# Altium PCB RatumnScanner_PcbDoc@20260328.pcbdoc (part 1 of 2)
Units mil, origin at the board's own origin, x right, y up, seen from the top; angles counter-clockwise.
Board outline 3937.01 x 983.86 mil, 6 copper layers (Top Layer, 内层1, 内层2, CONNECTION, IO_PINS, Bottom Layer), stack 62.125 mil thick; 143 components, 128 nets, 581 pads, 302 vias.
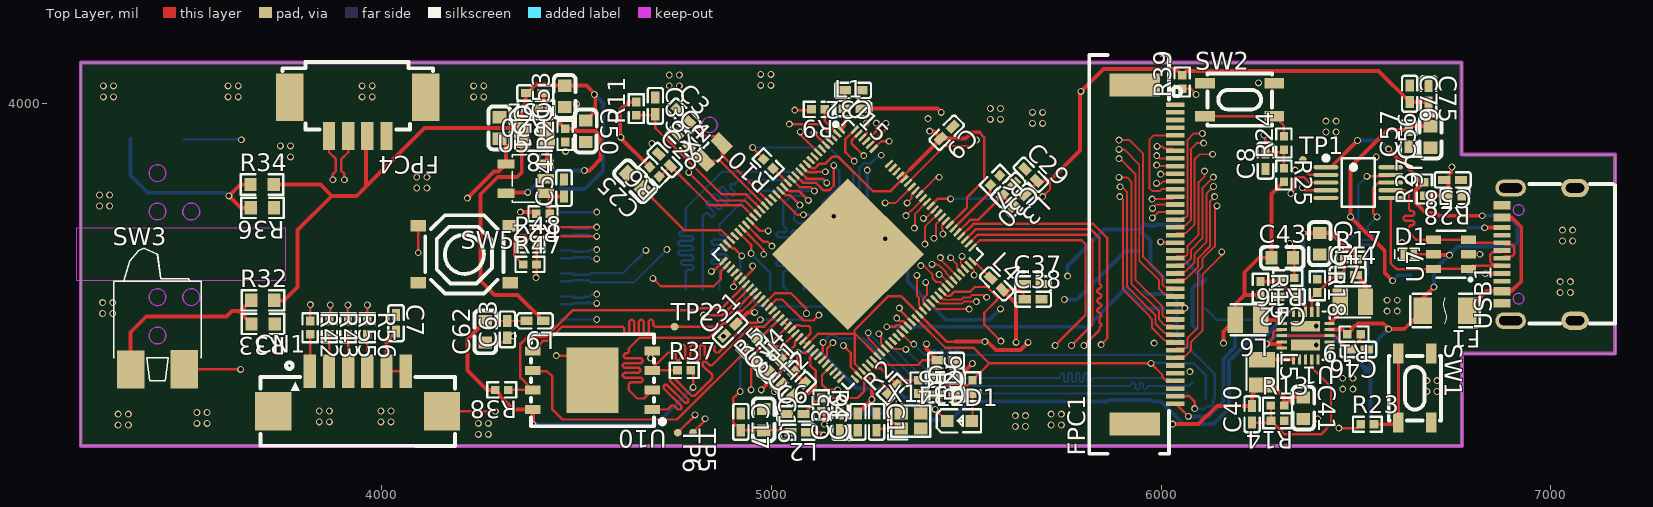
[diagram p0: Top Layer view]
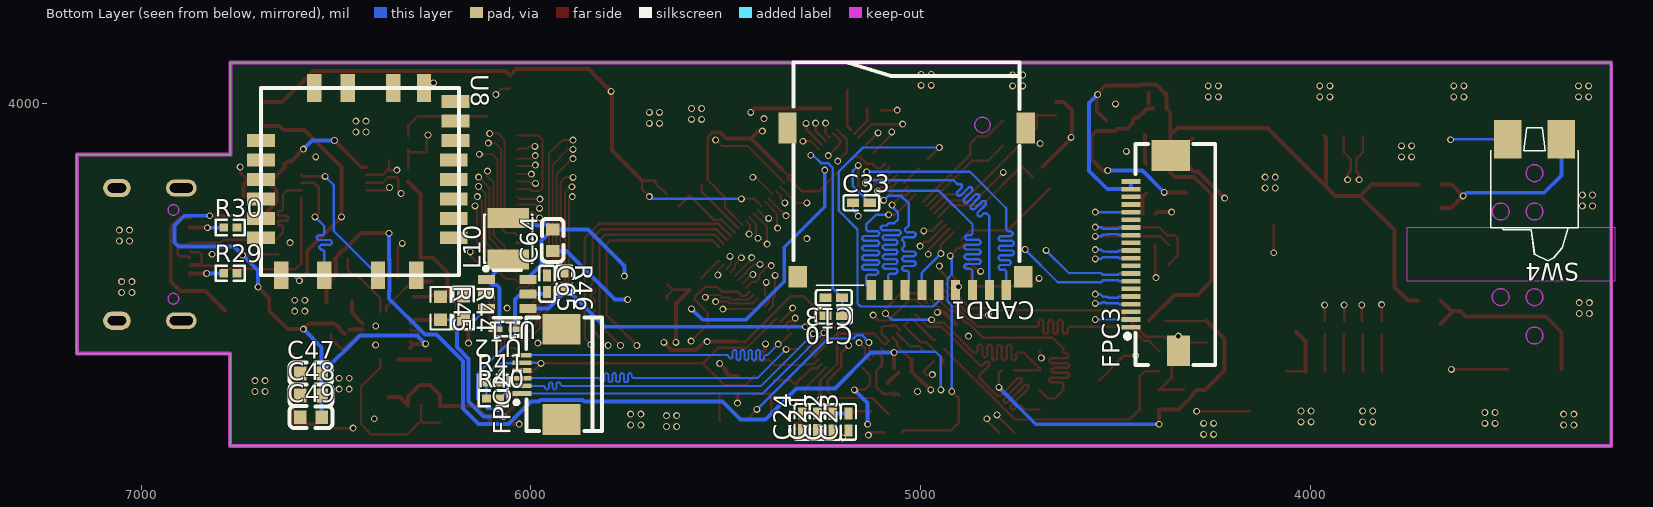
[diagram p1: Bottom Layer view, seen from below]
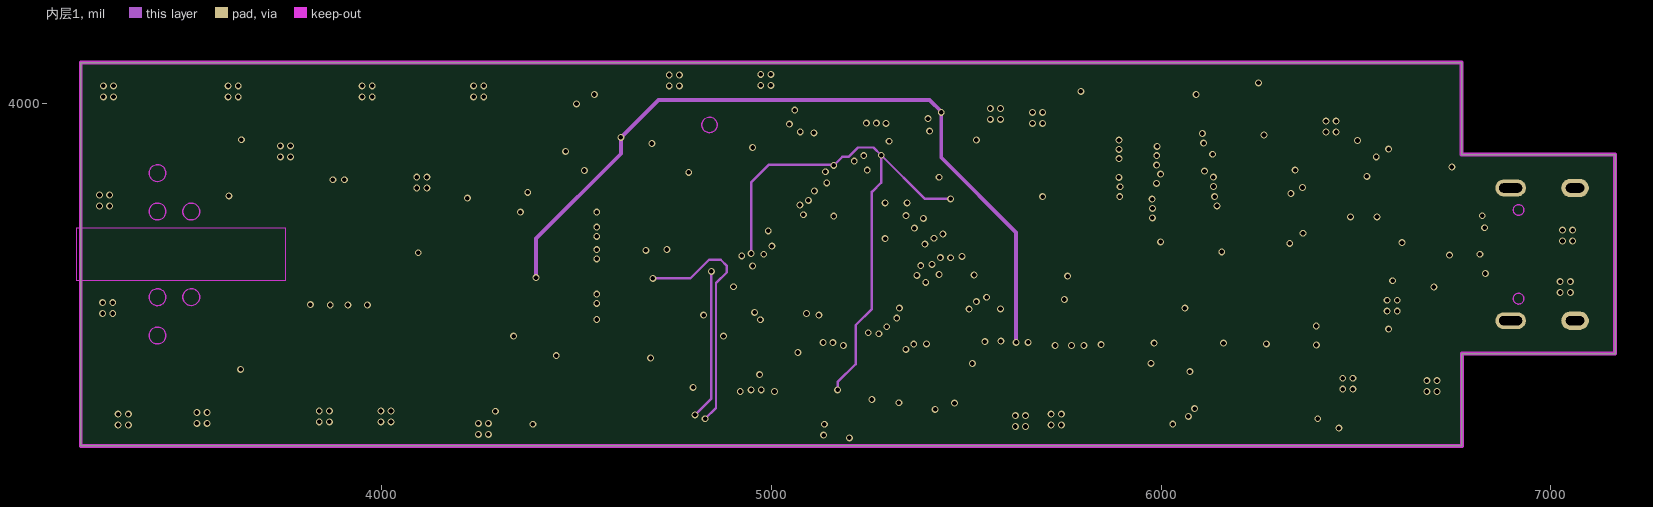
[diagram p2: 内层1]
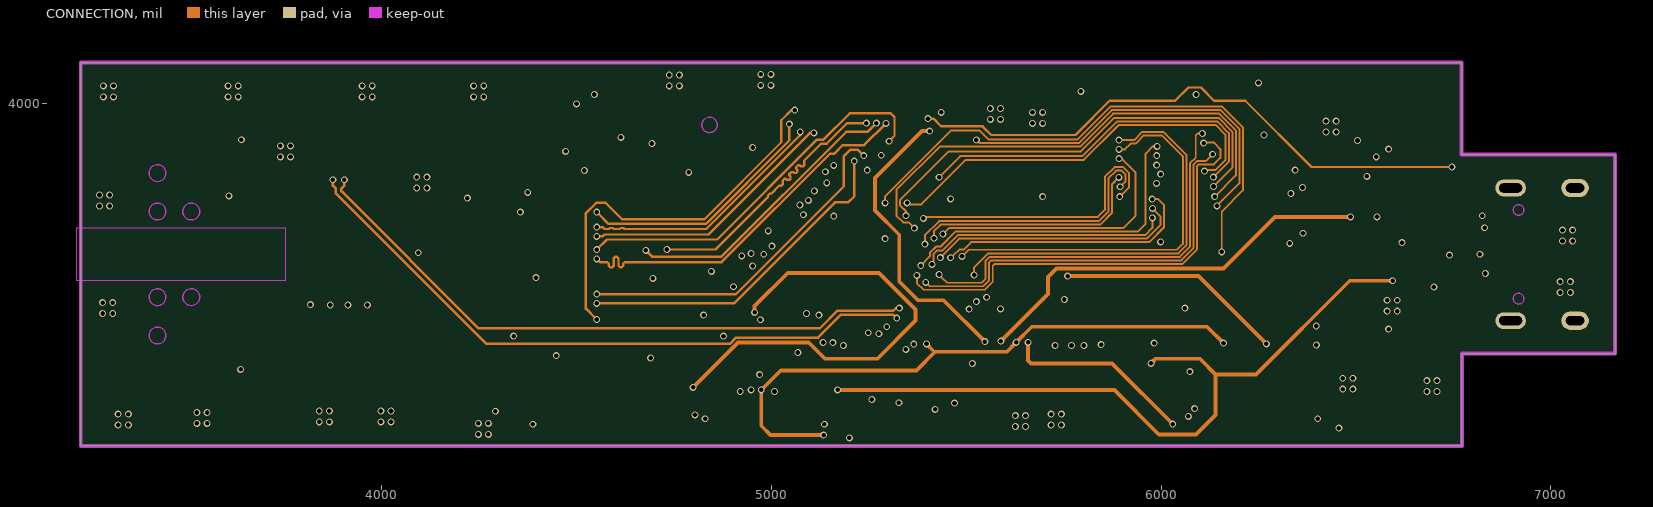
[diagram p3: CONNECTION]
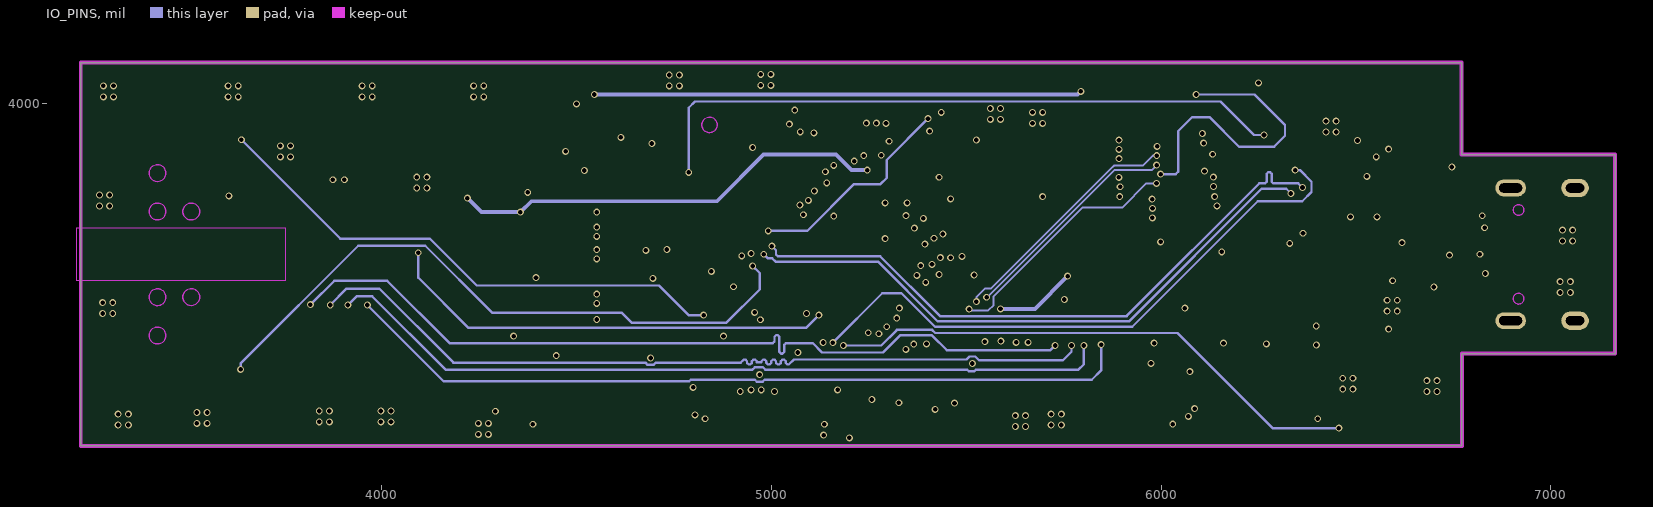
[diagram p4: IO_PINS]

## Layer stack, top to bottom
Top Layer: signal copper 1.378
Dielectric1: surface 3.913, 3313 RC57% 4.2mil, Dk 0
内层1: signal copper 1.378
Dielectric2: surface 21.654, 0.55mm H/H No copper, Dk 0
内层2: signal copper 1.378
Dielectric3: surface 4.283, 2116 RC54% 4.9mil, Dk 0
CONNECTION: signal copper 0.598
Dielectric4: surface 21.654, 0.55mm H/H No copper, Dk 0
IO_PINS: signal copper 0.598
Dielectric5: surface 3.913, 3313 RC57% 4.2mil, Dk 0
Bottom Layer: signal copper 1.378

## Board outline
7165.01,3869.86 7165.01,3359.23 6771.9,3359.23 6771.9,3122.14 3228,3122.14 3228,4106 6771.31,4106 6771.31,3869.86

## Design rules (kind name [scope] priority, off if disabled: settings)
BoardOutlineClearance copperThickness1oz [All] p0: genericclearance=10 ignorepadtopadclearanceinfootprint=FALSE except(0: Arc-SplitContinuation Track-SplitContinuation SMDPad-SplitContinuation THPad-SplitContinuation Via-SplitContinuation Fill-SplitContinuation Poly-SplitContinuation Region-SplitContinuation Text-SplitContinuation)
BoardOutlineClearance copperThickness2oz [All] p0: genericclearance=10 ignorepadtopadclearanceinfootprint=FALSE except(0: Arc-SplitContinuation Track-SplitContinuation SMDPad-SplitContinuation THPad-SplitContinuation Via-SplitContinuation Fill-SplitContinuation Poly-SplitContinuation Region-SplitContinuation Text-SplitContinuation)
BoardOutlineClearance 50R_安全间距 [All] p0: genericclearance=10 ignorepadtopadclearanceinfootprint=FALSE except(0: Arc-SplitContinuation Track-SplitContinuation SMDPad-SplitContinuation THPad-SplitContinuation Via-SplitContinuation Fill-SplitContinuation Poly-SplitContinuation Region-SplitContinuation Text-SplitContinuation)
BoardOutlineClearance Plane_innerPlane [All] p0: genericclearance=10 ignorepadtopadclearanceinfootprint=FALSE except(0: Arc-SplitContinuation Track-SplitContinuation SMDPad-SplitContinuation THPad-SplitContinuation Via-SplitContinuation Fill-SplitContinuation Poly-SplitContinuation Region-SplitContinuation Text-SplitContinuation)
BoardOutlineClearance Copper_copperRegion [All] p0: genericclearance=10 ignorepadtopadclearanceinfootprint=FALSE except(0: Arc-SplitContinuation Track-SplitContinuation SMDPad-SplitContinuation THPad-SplitContinuation Via-SplitContinuation Fill-SplitContinuation Poly-SplitContinuation Region-SplitContinuation Text-SplitContinuation)
BoardOutlineClearance otherClearance [All] p0: genericclearance=10 ignorepadtopadclearanceinfootprint=FALSE except(0: Arc-SplitContinuation Track-SplitContinuation SMDPad-SplitContinuation THPad-SplitContinuation Via-SplitContinuation Fill-SplitContinuation Poly-SplitContinuation Region-SplitContinuation Text-SplitContinuation)
Clearance copperThickness1oz [All] p1: gap=7 ignorepadtopadclearanceinfootprint=FALSE
Clearance copperThickness2oz [All] p1: gap=7 ignorepadtopadclearanceinfootprint=FALSE
Clearance 50R_安全间距 [All] p1: gap=7 ignorepadtopadclearanceinfootprint=FALSE
Clearance Plane_innerPlane [All] p1: gap=7 ignorepadtopadclearanceinfootprint=FALSE
Clearance Copper_copperRegion [All] p1: gap=7 ignorepadtopadclearanceinfootprint=FALSE
Clearance otherClearance [All] p1: gap=7 ignorepadtopadclearanceinfootprint=FALSE
DiffPairsRouting USB [All] p1: maxuncoupledlength=30 minlimit=7.4803 maxlimit=Infinity mostfreqgap=7.7953 toplayer_minwidth=6.1811 toplayer_prefwidth=6.1811 toplayer_maxwidth=6.1811 bottomlayer_minwidth=6.1811 bottomlayer_prefwidth=6.1811 bottomlayer_maxwidth=6.1811 midlayer1_minwidth=6.1811 midlayer1_prefwidth=6.1811 midlayer1_maxwidth=6.1811 midlayer2_minwidth=6.1811 midlayer2_prefwidth=6.1811 midlayer2_maxwidth=6.1811 midlayer3_minwidth=6.1811 midlayer3_prefwidth=6.1811 midlayer3_maxwidth=6.1811 midlayer4_minwidth=6.1811 midlayer4_prefwidth=6.1811 midlayer4_maxwidth=6.1811
DiffPairsRouting GMII/MIPI [All] p1: maxuncoupledlength=10 minlimit=7.9921 maxlimit=Infinity mostfreqgap=7.9921 toplayer_minwidth=4.8819 toplayer_prefwidth=4.8819 toplayer_maxwidth=4.8819 bottomlayer_minwidth=4.8819 bottomlayer_prefwidth=4.8819 bottomlayer_maxwidth=4.8819 midlayer1_minwidth=4.8819 midlayer1_prefwidth=4.8819 midlayer1_maxwidth=4.8819 midlayer2_minwidth=4.8819 midlayer2_prefwidth=4.8819 midlayer2_maxwidth=4.8819 midlayer3_minwidth=4.8819 midlayer3_prefwidth=4.8819 midlayer3_maxwidth=4.8819 midlayer4_minwidth=4.8819 midlayer4_prefwidth=4.8819 midlayer4_maxwidth=4.8819
DiffPairsRouting MIC [All] p1: maxuncoupledlength=27.5984 minlimit=7.9921 maxlimit=Infinity mostfreqgap=7.9921 toplayer_minwidth=4.0157 toplayer_prefwidth=4.0157 toplayer_maxwidth=4.0157 bottomlayer_minwidth=4.0157 bottomlayer_prefwidth=4.0157 bottomlayer_maxwidth=4.0157 midlayer1_minwidth=4.0157 midlayer1_prefwidth=4.0157 midlayer1_maxwidth=4.0157 midlayer2_minwidth=4.0157 midlayer2_prefwidth=4.0157 midlayer2_maxwidth=4.0157 midlayer3_minwidth=4.0157 midlayer3_prefwidth=4.0157 midlayer3_maxwidth=4.0157 midlayer4_minwidth=4.0157 midlayer4_prefwidth=4.0157 midlayer4_maxwidth=4.0157
PasteMaskExpansion pasteMaskExpansion [All] p1: expansion=0
PlaneConnect innerPlane [All] p1: planeconnectstyle=Relief reliefexpansion=20 reliefentries=4 reliefconductorwidth=10 reliefairgap=10
PolygonConnect copperRegion [All] p1: connectstyle=Direct reliefentries=4 reliefconductorwidth=10 polygonreliefangle="90 Angle" airgapwidth=10
RoutingVias viaSize [All] p1: viastyle="Through Hole" holewidth=11.811 minholewidth=11.811 maxholewidth=247.9922 width=11.811 minwidth=11.811 maxwidth=247.9922
SolderMaskExpansion solderMaskExpansion [All] p1: useseparateexpansions=TRUE expansion=2.0079 expansionbottom=2.0079
Width copperThickness1oz [All] p1: maxlimit=100 minlimit=5 preferedwidth=8
Width Sign50R [All] p1: maxlimit=6 minlimit=6 preferedwidth=6

## Components (designator, comment, footprint, x,y, rotation, side; value= is the part's Value field where it differs from the comment)
C1 "" C0402 5270,3184 r270 top
C2 "" C0402 5448,3254 r0 top
C3 "" C0402 4774,3970 r315 top
C4 "" C0402 4774,3906 r315 top
C6 "" C0402 5060.95,3204.4 r0 top
C7 "" C0402 4036.97,3437.18 r270 top
C8 "" C0402 6267.74,3854.2 r90 top
C9 "" C0402 5450,3926 r225 top
C10 "" C0402 5222.81,3456.06 r0 bottom
C11 "" C0402 5041.74,3295.75 r45 top
C12 "" C0402 5069.75,3268.26 r45 top
C13 "" C0402 5222.81,3502.71 r0 bottom
C14 "" C0402 5008,3328 r45 top
C15 "" C0402 5448.21,3342.01 r180 top
C16 "" C0603 4980.26,3189.39 r270 top
C17 "" C0402 4921.62,3183.92 r270 top
C21 "" C0402 5265.25,3184.02 r90 bottom
C22 "" C0402 5225.25,3183.43 r90 bottom
C23 "" C0402 5185.25,3183.73 r90 bottom
C24 "" C0402 5304,3184 r90 bottom
C25 "" C0603 4650,3802 r135 top
C28 "" C0402 4726,3856 r315 top
C29 "" C0402 5666,3818 r315 top
C30 "" C0402 5608,3780 r225 top
C31 "" C0402 4894,3420 r45 top
C32 "" C0402 5209.82,4034.76 r180 top
C33 "" C0402 5152,3746 r180 bottom
C34 "" C0402 5448,3302 r180 top
C35 "" C0402 5176,3184 r90 top
C36 "" C0402 5222,3184 r90 top
C37 "" C0402 5671.5,3537.77 r0 top
C38 "" C0402 5671.5,3498.82 r0 top
C39 "" C0402 4702.21,3994.77 r270 top
C40 "" C0402 6233.47,3203.6 r90 top
C41 "" C0603 6364.93,3219.06 r270 top
C42 "" C0402 6322.93,3505.06 r180 top
C43 "" C0603 6310.93,3605.06 r0 top
C44 "" C0402 6478.93,3561.06 r0 top
C45 "" C0603 6406.93,3641.06 r270 top
C46 "" C0402 6506.25,3369.78 r180 top
C47 "" C0603 6564.47,3308.09 r180 bottom
C48 "" C0603 6564,3252 r180 bottom
C49 "" C0603 6564,3196 r180 bottom
C50 "" C0603 4523.64,3929.83 r270 top
C51 "" C0603 4302,3938 r270 top
C52 "" C0402 4394,4028 r180 top
C53 "" C0603 4469.64,4019.21 r90 top
C54 "" C0402 4468,3784 r90 top
C56 "" C0603 6691.58,3915.25 r90 top
C57 "" C0402 6635.36,3911.24 r90 top
C58 "" C0402 6748.11,3804.82 r180 top
C62 "" C0603 4266.07,3415.29 r90 top
C63 "" C0402 4322.56,3421.27 r90 top
C64 "" C0603 5944,3650 r90 bottom
C65 "" C0402 5958.54,3538.54 r270 bottom
C75 "" C0402 6686.13,4024.89 r270 top
C76 "" C0402 6637.94,4025.79 r270 top
CARD1 "" TF-SMD_TF-01A 5036.18,3730.28 r0 bottom
CN1 "" CONN-SMD_6P-P1.25_HC-1.25-6PWT 3938.59,3262.49 r0 top
D1 "" DFN1006-2L-BI-1 6635.36,3614.07 r0 top
F1 "" F1206 6728.39,3469.5 r180 top
FPC1 "" FPC-SMD_P0.50-40P_LCS-SJ-H2.0 5983.91,3613.87 r90 top
FPC2 "" FPC-SMD_6P-P0.50_XUNPU_FPC-05F-6PH20 5972,3306 r90 bottom
FPC3 "" FPC-SMD_20P-P0.50_XUNPU_FPC-05F-20PH20 4409.1,3613.87 r90 bottom
FPC4 "" CONN-SMD_1.25-4PWB 3938.79,3967.46 r180 top
L1 "" L0402 5209.85,3987.71 r0 top
L2 "" L0402 5070.26,3157.39 r180 top
L3 "" L0402 5636,3752 r225 top
L4 "" L0402 5578,3538 r315 top
L5 "" IND-SMD_L2.0-W1.6 6258.93,3311.06 r270 top
L6 "" IND-SMD_L2.0-W1.6 6222.88,3445.84 r180 top
L7 "" IND-SMD_L2.0-W1.6 6492,3492 r0 top
L8 "" IND-SMD_L2.0-W1.6 4392,3920 r180 top
L9 "" L0402 4393.32,3443.4 r180 top
L10 "" IND-SMD_L3.0-W3.0_FNR30XXS 6058,3654 r90 bottom
LED1 "" LED_0603 5484.96,3186.64 r0 top
R1 "" R0402 5376.81,3273.7 r270 top
R2 "" R0402 5310,3268 r45 top
R4 "" R0402 5127.91,3228.31 r270 top
R5 "" R0402 4978,3352 r45 top
R6 "" R0402 4700,3826 r135 top
R7 "" R0402 5574,3804 r225 top
R8 "" R0402 4950,3382 r225 top
R9 "" R0402 5120,3986 r180 top
R10 "" R0402 4992,3846 r135 top
R11 "" R0402 4653.27,3987.85 r90 top
R13 "" R0402 6298.57,3226.14 r0 top
R14 "" R0402 6299.11,3187.09 r180 top
R15 "" R0402 6254.93,3527.06 r270 top
R16 "" R0402 6324.93,3553.06 r180 top
R17 "" R0402 6486.93,3601.06 r0 top
R18 "" R0402 6400.93,3533.06 r270 top
R19 "" R0402 6494.93,3409.06 r180 top
R20 "" R0402 4386,3988 r180 top
R21 "" R0402 4470.96,3918.96 r90 top
R22 "" R0402 4414,3718 r180 top
R23 "" R0402 6529.37,3177.88 r0 top
R24 "" R0402 6315.11,3899.67 r90 top
R25 "" R0402 6315.11,3817.34 r270 top
R26 "" R0402 5516,3274 r90 top
R27 "" R0402 6675.24,3781.46 r90 top
R28 "" R0402 6754.13,3762.65 r180 top
R29 "" R0402 6771.31,3565.36 r180 bottom
R30 "" R0402 6771.31,3682.77 r180 bottom
R32 "" R0603 3695.14,3495.91 r0 top
R33 "" R0603 3695.83,3435.37 r180 top
R34 "" R0603 3693.13,3793.15 r0 top
R36 "" R0603 3694.22,3733.22 r180 top
R37 "" R0402 4776.32,3316.2 r0 top
R38 "" R0402 4308.18,3266 r180 top
R39 "" R0402 6054,4056 r90 top
R40 "" R0402 6097.01,3243.9 r180 bottom
R41 "" R0402 6097.01,3284.84 r180 bottom
R42 "" R0402 3816.49,3425.87 r270 top
R43 "" R0402 3866,3425.87 r270 top
R44 "" R0603 6173.07,3476.24 r270 bottom
R45 "" R0603 6231.65,3475.4 r270 bottom
R46 "" R0402 5914,3548 r270 bottom
R47 "" R0402 4380.52,3587.97 r0 top
R48 "" R0402 4380.52,3638.17 r0 top
R55 "" R0402 3913.49,3425.87 r270 top
R56 "" R0402 3963.23,3425.87 r270 top
SW1 "" SW-SMD_4P-L4.2-W3.3-P2.15-LS5.1 6651.03,3270.52 r270 top
SW2 "" SW-SMD_4P-L4.2-W3.3-P2.15-LS5.1 6201.76,4010.81 r0 top
SW3 "" SW-SMD_ESE22MH24 3424.85,3318.6 r0 top
SW4 "" SW-SMD_ESE22MH24 3424.85,3909.15 r0 bottom
SW5 "" SW-SMD_4P-L5.1-W5.1-P3.70-LS6.5-TL_H1.5 4212.25,3613.87 r0 top
TP1 "" Test-Point-0.5mm 6364,3856 r0 top
TP2 "" Test-Point-0.5mm 4751.6,3428.27 r0 top
TP5 "" Test-Point-0.5mm 4798.99,3156.38 r270 top
TP6 "" Test-Point-0.5mm 4759.62,3156.38 r270 top
U1 "" QFN-20_L3.0-W3.0-P0.40-BL-EP1.9 6370.73,3405.12 r180 top
U5 "" SOT-23-5_L3.0-W1.7-P0.95-LS2.8-BR 4370,3808 r0 top
U6 "" MSOP-10_L3.0-W3.0-P0.50-LS5.0-BL 6506,3798 r270 top
U7 "" SOT-23-6_L2.9-W1.7-P0.95-LS2.8-BL 6743.79,3614.07 r90 top
U8 "" AIC8800DC 6438.49,3800.4 r270 bottom
U10 "" WSON-8_L8.0-W6.0-P1.27-TL-EP-1 4541.15,3290.8 r180 top
U11 "" SOT-23-6_L2.9-W1.6-P0.95-LS2.8-BR 6060.64,3512.11 r0 bottom
U12 "" SOD-523_L1.2-W0.8-LS1.6-RD 6066,3422 r0 bottom
U15 "" QFN-128_L12.3-W12.3-P0.35-TL-EP7.0-1 5196.5,3613.87 r315 top
USB1 "" USB-C-SMD_TYPE-C-6PIN-2MD-073 6968.67,3613.87 r90 top
X1 "" CRYSTAL-SMD_4P-L2.0-W1.6-BL-A 5358,3186 r0 top
X2 "" CRYSTAL-SMD_2P-L2.0-W1.2 4850,3876 r45 top

## Footprints (in the part's own frame and the unit in brackets; to place one, negate y for a bottom-side part, rotate by r counter-clockwise, add the part's x,y. Pads: shape width x height; smd on the part's side, far side on the other; paste and mask are expansions set on the pad)
AIC8800DC [mm]
  rect 1.8x0.94 smd: 1(-6.1,4.17) 2(-6.1,2.17) 3(-6.1,-0.81) 4(-6.1,-2.97) 11(6.1,-5.13) 12(6.1,-2.33) 13(6.1,1.17) 14(6.1,3.67)
  rect 0.84x1.8 smd: 5(-2.69,-6.45) 6(-1.42,-6.45) 7(-0.15,-6.45) 8(1.12,-6.45) 9(2.39,-6.45) 10(3.66,-6.45) 15(3.66,6.1) 16(2.39,6.1) 17(1.12,6.1) 18(-0.15,6.1) 19(-1.42,6.1) 20(-2.69,6.223) 21(-3.96,6.223) 22(-5.23,6.223)
  silkscreen extent -6.1,-6.45 6.1,6.45
C0402 [mm]
  rect 0.79x0.54 smd: 1(-0.545,0) 2(0.545,0)
  silkscreen extent -1.17,-0.5 1.17,0.5
C0603 [mm]
  rect 0.8x0.9 smd: 1(-0.7,0) 2(0.7,0)
  silkscreen extent -1.41,-0.71 1.39,0.72
CONN-SMD_1.25-4PWB [mm]
  rect 0.8x1.8 smd: 1(-1.875,1.266) 2(-0.625,1.266) 3(0.625,1.266) 4(1.875,1.266)
  rect 1.8x3.1 smd: 5(-4.425,-1.266) 6(4.425,-1.266)
  silkscreen extent -4.9,-3.55 4.9,0.85
CONN-SMD_6P-P1.25_HC-1.25-6PWT [mm]
  rect 0.8x2.2 smd: 1(-3.125,1.3) 2(-1.875,1.3) 3(-0.625,1.3) 4(0.625,1.3) 5(1.875,1.3) 6(3.125,1.3)
  rect 2.35x2.5 smd: 7(-5.505,-1.3) 8(5.505,-1.3)
  silkscreen extent -6.33,-3.56 6.35,1.88
CRYSTAL-SMD_2P-L2.0-W1.2 [mm]
  rect 0.8x1.3 smd: 1(-0.8,0) 2(0.8,0)
  silkscreen extent -0.22,-0.64 0.22,0.64
CRYSTAL-SMD_4P-L2.0-W1.6-BL-A [mm]
  rect 0.875x0.775 smd: 1(-0.638,-0.488) 2(0.638,-0.488) 3(0.638,0.488) 4(-0.638,0.488)
  silkscreen extent -1.49,-1.2 1.27,1.02
DFN1006-2L-BI-1 [mm]
  rect 0.4x0.6 smd: 1(-0.325,0) 2(0.325,0)
  silkscreen extent -0.9,-0.4 0.68,0.4
F1206 [mm]
  rect 1.19x1.728 smd: 1(-1.445,0) 2(1.445,0)
  silkscreen extent -2.27,-1.09 2.27,1.09
FPC-SMD_6P-P0.50_XUNPU_FPC-05F-6PH20 [mm]
  rect 0.3x1.25 smd: 1(-1.25,1.288) 2(-0.75,1.288) 3(-0.25,1.288) 4(0.25,1.288) 5(0.75,1.288) 6(1.25,1.288)
  rect 2x2.5 smd: 7(2.94,-1.288) 8(-2.94,-1.288)
  silkscreen extent -3.7,-3.91 3.7,1.78
FPC-SMD_20P-P0.50_XUNPU_FPC-05F-20PH20 [mm]
  rect 0.3x1.25 smd: 1(-4.75,1.288) 2(-4.25,1.288) 3(-3.75,1.288) 4(-3.25,1.288) 5(-2.75,1.288) 6(-2.25,1.288) 7(-1.75,1.288) 8(-1.25,1.288) 9(-0.75,1.288) 10(-0.25,1.288) 11(0.25,1.288) 12(0.75,1.288) 13(1.25,1.288) 14(1.75,1.288) 15(2.25,1.288) 16(2.75,1.288) 17(3.25,1.288) 18(3.75,1.288) 19(4.25,1.288) 20(4.75,1.288)
  rect 2x2.5 smd: 21(6.44,-1.287)
  rect 2x1.5 smd: 22(-6.287,-1.797)
  silkscreen extent -7.2,-4.19 7.2,1.67
FPC-SMD_P0.50-40P_LCS-SJ-H2.0 [mm]
  rect 0.3x1.2 smd: 1(9.751,-1.318) 2(9.252,-1.318) 3(8.753,-1.318) 4(8.252,-1.318) 5(7.752,-1.318) 6(7.252,-1.318) 7(6.751,-1.318) 8(6.251,-1.318) 9(5.753,-1.318) 10(5.253,-1.318) 11(4.752,-1.318) 12(4.252,-1.318) 13(3.752,-1.318) 14(3.251,-1.318) 15(2.752,-1.318) 16(2.253,-1.318) 17(1.753,-1.318) 18(1.252,-1.318) 19(0.752,-1.318) 20(0.251,-1.318) 21(-0.249,-1.318) 22(-0.748,-1.318) 23(-1.247,-1.318) 24(-1.748,-1.318) 25(-2.248,-1.318) 26(-2.748,-1.318) 27(-3.249,-1.318) 28(-3.749,-1.318) 29(-4.247,-1.318) 30(-4.747,-1.318) 31(-5.248,-1.318) 32(-5.748,-1.318) 33(-6.248,-1.318) 34(-6.749,-1.318) 35(-7.248,-1.318) 36(-7.747,-1.318) 37(-8.247,-1.318) 38(-8.748,-1.318) 39(-9.248,-1.318) 40(-9.749,-1.318)
  rect 1.5x3.3 smd: 41(11.044,1.318) 42(-11.044,1.318)
  silkscreen extent -13,-1.73 13,4.28
IND-SMD_L2.0-W1.6 [mm]
  rect 1x1.72 smd: 1(0.828,0) 2(-0.828,0)
  silkscreen extent -1.14,-1.02 1.14,1.02
IND-SMD_L3.0-W3.0_FNR30XXS [mm]
  rect 1.3x2.72 smd: 1(1.35,0) 2(-1.35,0)
  silkscreen extent -1.58,-1.58 1.58,1.58
L0402 [mm]
  rect 0.79x0.54 smd: 1(-0.545,0) 2(0.545,0)
  silkscreen extent -1.17,-0.5 1.17,0.5
LED_0603 [mil]
  rect 31.5x31.5 smd: 1(-33.5,-0.4) 2(29.5,-0.2)
  silkscreen extent -61,-30 53,30
MSOP-10_L3.0-W3.0-P0.50-LS5.0-BL [mm]
  oval 0.28x1.62 smd: 1(-1,-2.11) 2(-0.5,-2.11) 3(0,-2.11) 4(0.5,-2.11) 5(1,-2.11) 6(1,2.11) 7(0.5,2.11) 8(0,2.11) 9(-0.5,2.11) 10(-1,2.11)
  silkscreen extent -1.74,-2.26 1.58,1.07
QFN-20_L3.0-W3.0-P0.40-BL-EP1.9 [mm]
  rect 0.2x0.665 smd: 1(-0.8,-1.55) 2(-0.4,-1.55) 3(0,-1.55) 4(0.4,-1.55) 5(0.8,-1.55) 11(0.8,1.55) 12(0.4,1.55) 13(0,1.55) 14(-0.4,1.55) 15(-0.8,1.55)
  rect 0.665x0.2 smd: 6(1.55,-0.8) 7(1.55,-0.4) 8(1.55,0) 9(1.55,0.4) 10(1.55,0.8) 16(-1.55,0.8) 17(-1.55,0.4) 18(-1.55,0) 19(-1.55,-0.4) 20(-1.55,-0.8)
  rect 1.9x0.699 smd: 21(0,0.61) 21(0,-0.61)
  silkscreen extent -1.58,-2.11 1.58,1.58
QFN-128_L12.3-W12.3-P0.35-TL-EP7.0-1 [mm]
  rect 0.665x0.196 smd: 1(-6.057,5.425) 2(-6.057,5.075) 3(-6.057,4.725) 4(-6.057,4.375) 5(-6.057,4.025) 6(-6.057,3.675) 7(-6.057,3.325) 8(-6.057,2.975) 9(-6.057,2.625) 10(-6.057,2.275) 11(-6.057,1.925) 12(-6.057,1.575) 13(-6.057,1.225) 14(-6.057,0.875) 15(-6.057,0.525) 16(-6.057,0.175) 17(-6.057,-0.175) 18(-6.057,-0.525) 19(-6.057,-0.875) 20(-6.057,-1.225) 21(-6.057,-1.575) 22(-6.057,-1.925) 23(-6.057,-2.275) 24(-6.057,-2.625) 25(-6.057,-2.975) 26(-6.057,-3.325) 27(-6.057,-3.675) 28(-6.057,-4.025) 29(-6.057,-4.375) 30(-6.057,-4.725) 31(-6.057,-5.075) 32(-6.057,-5.425) 65(6.058,-5.425) 66(6.058,-5.075) 67(6.058,-4.725) 68(6.058,-4.375) 69(6.058,-4.025) 70(6.058,-3.675) 71(6.058,-3.325) 72(6.058,-2.975) 73(6.058,-2.625) 74(6.058,-2.275) 75(6.058,-1.925) 76(6.058,-1.575) 77(6.058,-1.225) 78(6.058,-0.875) 79(6.058,-0.525) 80(6.058,-0.175) 81(6.058,0.175) 82(6.058,0.525) 83(6.058,0.875) 84(6.058,1.225) 85(6.058,1.575) 86(6.058,1.925) 87(6.058,2.275) 88(6.058,2.625) 89(6.058,2.975) 90(6.058,3.325) 91(6.058,3.675) 92(6.058,4.025) 93(6.058,4.375) 94(6.058,4.725) 95(6.058,5.075) 96(6.058,5.425)
  rect 0.196x0.665 smd: 33(-5.425,-6.057) 34(-5.075,-6.057) 35(-4.725,-6.057) 36(-4.375,-6.057) 37(-4.025,-6.057) 38(-3.675,-6.057) 39(-3.325,-6.057) 40(-2.975,-6.057) 41(-2.625,-6.057) 42(-2.275,-6.057) 43(-1.925,-6.057) 44(-1.575,-6.057) 45(-1.225,-6.057) 46(-0.875,-6.057) 47(-0.525,-6.057) 48(-0.175,-6.057) 49(0.175,-6.057) 50(0.525,-6.057) 51(0.875,-6.057) 52(1.225,-6.057) 53(1.575,-6.057) 54(1.925,-6.057) 55(2.275,-6.057) 56(2.625,-6.057) 57(2.975,-6.057) 58(3.325,-6.057) 59(3.675,-6.057) 60(4.025,-6.057) 61(4.375,-6.057) 62(4.725,-6.057) 63(5.075,-6.057) 64(5.425,-6.057) 97(5.425,6.057) 98(5.075,6.057) 99(4.725,6.057) 100(4.375,6.057) 101(4.025,6.057) 102(3.675,6.057) 103(3.325,6.057) 104(2.975,6.057) 105(2.625,6.057) 106(2.275,6.057) 107(1.925,6.057) 108(1.575,6.057) 109(1.225,6.057) 110(0.875,6.057) 111(0.525,6.057) 112(0.175,6.057) 113(-0.175,6.057) 114(-0.525,6.057) 115(-0.875,6.057) 116(-1.225,6.057) 117(-1.575,6.057) 118(-1.925,6.057) 119(-2.275,6.057) 123(-3.675,6.057) 124(-4.025,6.057) 125(-4.375,6.057) 126(-4.725,6.057) 127(-5.075,6.057) 128(-5.425,6.057)
  rect 7x7 smd: 129(0,0)
  silkscreen extent -6.68,-6.23 6.23,6.23
R0402 [mm]
  rect 0.566x0.54 smd: 1(-0.433,0) 2(0.433,0)
  silkscreen extent -0.94,-0.5 0.94,0.5
R0603 [mil]
  rect 31.75x34.02 smd: 1(-29.66,0) 2(29.66,0)
  silkscreen extent -55,-26 55,26
SOD-523_L1.2-W0.8-LS1.6-RD [mm]
  rect 0.93x0.36 smd: 1(-0.635,0) 2(0.635,0)
  silkscreen extent -0.91,-0.55 0.68,0.55
SOT-23-5_L3.0-W1.7-P0.95-LS2.8-BR [mm]
  rect 1.1x0.6 smd: 1(1.3,-0.95) 2(1.3,0) 3(1.3,0.95) 4(-1.3,0.95) 5(-1.3,-0.95)
  silkscreen extent -0.9,-1.78 1.65,1.55
SOT-23-6_L2.9-W1.6-P0.95-LS2.8-BR [mm]
  rect 1.1x0.6 smd: 1(1.35,-0.95) 2(1.35,0) 3(1.35,0.95) 4(-1.35,0.95) 5(-1.35,0) 6(-1.35,-0.95)
  silkscreen extent -0.9,-1.78 1.52,1.55
SOT-23-6_L2.9-W1.7-P0.95-LS2.8-BL [mm]
  rect 0.532x0.99 smd: 1(-0.95,-1.145) 2(0,-1.145) 3(0.95,-1.145) 4(0.95,1.145) 5(0,1.145) 6(-0.95,1.145)
  silkscreen extent -1.75,-1.37 1.53,0.93
SW-SMD_4P-L4.2-W3.3-P2.15-LS5.1 [mm]
  rect 1.3x0.7 smd: 1(-2.25,1.075) 2(2.25,1.075) 3(-2.25,-1.075) 4(2.25,-1.075)
  silkscreen extent -2.1,-1.7 2.1,1.7
SW-SMD_4P-L5.1-W5.1-P3.70-LS6.5-TL_H1.5 [mm]
  rect 1x0.75 smd: 1(-3,1.85) 2(3,1.85) 3(-3,-1.85) 4(3,-1.85)
  silkscreen extent -2.55,-2.55 2.55,2.55
SW-SMD_ESE22MH24 [mm]
  rect 1.8x2.5 smd: 1(-1.75,-0.005) 2(1.75,0.005)
  Board Outline Layer circle w0.003: c0,2.207 r0.55
  Board Outline Layer circle w0.003: c0,4.707 r0.55
  Board Outline Layer circle w0.003: c2.2,4.712 r0.55
  Board Outline Layer region: 0.55,2.207 0.496,1.968 0.343,1.777 0.122,1.671 -0.122,1.671 -0.343,1.777 -0.496,1.968 -0.55,2.207 -0.55,2.207 -0.496,2.445 -0.343,2.637 -0.122,2.743 0.122,2.743 0.343,2.637 0.496,2.445 0.55,2.207
  Board Outline Layer region: 0.55,2.207 0.496,1.968 0.343,1.777 0.122,1.671 -0.122,1.671 -0.343,1.777 -0.496,1.968 -0.55,2.207 -0.55,2.207 -0.496,2.445 -0.343,2.637 -0.122,2.743 0.122,2.743 0.343,2.637 0.496,2.445 0.55,2.207
  Board Outline Layer region: 0.55,4.707 0.496,4.468 0.343,4.277 0.122,4.171 -0.122,4.171 -0.343,4.277 -0.496,4.468 -0.55,4.707 -0.55,4.707 -0.496,4.946 -0.343,5.137 -0.122,5.243 0.122,5.243 0.343,5.137 0.496,4.946 0.55,4.707
  Board Outline Layer region: 0.55,4.707 0.496,4.468 0.343,4.277 0.122,4.171 -0.122,4.171 -0.343,4.277 -0.496,4.468 -0.55,4.707 -0.55,4.707 -0.496,4.946 -0.343,5.137 -0.122,5.243 0.122,5.243 0.343,5.137 0.496,4.946 0.55,4.707
  Board Outline Layer region: 2.75,4.712 2.695,4.473 2.543,4.282 2.322,4.176 2.077,4.176 1.857,4.282 1.704,4.473 1.65,4.712 1.65,4.712 1.704,4.951 1.857,5.142 2.077,5.248 2.322,5.248 2.543,5.142 2.695,4.951 2.75,4.712
  Board Outline Layer region: 2.75,4.712 2.695,4.473 2.543,4.282 2.322,4.176 2.077,4.176 1.857,4.282 1.704,4.473 1.65,4.712 1.65,4.712 1.704,4.951 1.857,5.142 2.077,5.248 2.322,5.248 2.543,5.142 2.695,4.951 2.75,4.712
  silkscreen extent -2.85,-0.74 2.85,7.91
Test-Point-0.5mm [mm]
  round 0.5 smd: 1(0,0)
TF-SMD_TF-01A [mm]
  rect 0.6x1.3 smd: 1(2.301,5.276) 2(1.201,5.276) 3(0.101,5.276) 4(-0.999,5.276) 5(-2.099,5.276) 6(-3.199,5.276) 7(-4.299,5.276) 8(-5.399,5.276) 9(-6.499,5.276)
  rect 1.2x1.4 smd: 10(-7.599,4.426) 13(7.081,4.426)
  rect 1.2x2 smd: 11(-7.76,-5.276) 12(7.76,-5.276)
  Board Outline Layer circle w0.003: c-4.95,-5.478 r0.5
  Board Outline Layer region: -4.45,-5.478 -4.5,-5.261 -4.638,-5.087 -4.839,-4.991 -5.061,-4.991 -5.262,-5.087 -5.4,-5.261 -5.45,-5.478 -5.45,-5.478 -5.4,-5.695 -5.262,-5.869 -5.061,-5.965 -4.839,-5.965 -4.638,-5.869 -4.5,-5.695 -4.45,-5.478
  Board Outline Layer region: -4.45,-5.478 -4.5,-5.261 -4.638,-5.087 -4.839,-4.991 -5.061,-4.991 -5.262,-5.087 -5.4,-5.261 -5.45,-5.478 -5.45,-5.478 -5.4,-5.695 -5.262,-5.869 -5.061,-5.965 -4.839,-5.965 -4.638,-5.869 -4.5,-5.695 -4.45,-5.478
  silkscreen extent -7.37,-9.56 7.37,4.97
USB-C-SMD_TYPE-C-6PIN-2MD-073 [mm]
  rect 0.55x1.1 smd: 1(-3.2,2.375) 2(-2.4,2.375) 11(2.4,2.375) 12(3.2,2.375)
  rect 0.3x1.1 smd: 3(-1.75,2.375) 4(-1.25,2.375) 5(-0.75,2.375) 6(-0.25,2.375) 7(0.25,2.375) 8(0.75,2.375) 9(1.25,2.375) 10(1.75,2.375)
  oval 1.2x1.8 hole 0.6 slot 1.2 at 90 deg: 13(-4.325,-2.375) 14(4.325,-2.375)
  oval 1.1x2 hole 0.6 slot 1.5 at 90 deg: 13(-4.325,1.825) 14(4.325,1.825)
  Board Outline Layer circle w0.003: c-2.89,1.305 r0.35
  Board Outline Layer circle w0.003: c2.89,1.305 r0.35
  Board Outline Layer region: -2.89,0.955 -3.042,0.99 -3.164,1.087 -3.231,1.227 -3.231,1.383 -3.164,1.523 -3.042,1.62 -2.89,1.655 -2.89,1.655 -2.738,1.62 -2.616,1.523 -2.549,1.383 -2.549,1.227 -2.616,1.087 -2.738,0.99 -2.89,0.955
  Board Outline Layer region: -2.89,0.955 -3.042,0.99 -3.164,1.087 -3.231,1.227 -3.231,1.383 -3.164,1.523 -3.042,1.62 -2.89,1.655 -2.89,1.655 -2.738,1.62 -2.616,1.523 -2.549,1.383 -2.549,1.227 -2.616,1.087 -2.738,0.99 -2.89,0.955
  Board Outline Layer region: 2.89,0.955 2.738,0.99 2.616,1.087 2.549,1.227 2.549,1.383 2.616,1.523 2.738,1.62 2.89,1.655 2.89,1.655 3.042,1.62 3.164,1.523 3.231,1.383 3.231,1.227 3.164,1.087 3.042,0.99 2.89,0.955
  Board Outline Layer region: 2.89,0.955 2.738,0.99 2.616,1.087 2.549,1.227 2.549,1.383 2.616,1.523 2.738,1.62 2.89,1.655 2.89,1.655 3.042,1.62 3.164,1.523 3.231,1.383 3.231,1.227 3.164,1.087 3.042,0.99 2.89,0.955
  silkscreen extent -4.5,-4.97 4.57,0.6
WSON-8_L8.0-W6.0-P1.27-TL-EP-1 [mm]
  rect 1x0.6 smd: 1(-3.9,1.905) 2(-3.9,0.635) 3(-3.9,-0.635) 4(-3.9,-1.905) 5(3.9,-1.905) 6(3.9,-0.635) 7(3.9,0.635) 8(3.9,1.905)
  rect 3.4x4.3 smd: 9(0,0)
  silkscreen extent -4.7,-3 4,3

## Via types
v1: diameter 17.72, hole 11.81, Top Layer to Bottom Layer, 302 vias

## Nets (pads, with @x,y where several pads share a name; then routed paths per layer and width w, separated by ;. In a path a pad name is that pad's centre, name@x,y a point inside that pad or via, vN(x,y) a via of type N, cw(c..) or ccw(c..) an arc to the next point about the centre after c; other vN are vias at no path point)
$1N2117: C2.1 R1.2 X1.3 | length 104.9
  Top Layer w6.2: X1.3@5383.12,3205.21 5383.12,3250.35 R1.2@5376.81,3256.66 5423.88,3256.66 C2.1@5426.54,3254
$1N2122: R1.1 R2.2 U15.69 | length 150.2
  Top Layer w6.2: U15.69@5253.09,3333.19 5254.27,3333.19 5265.6,3321.87 5270.63,3321.87 5271.1,3321.39 5280.71,3321.39 R2.2@5322.05,3280.05 5332.74,3290.74 R1.1@5376.81,3290.74
$1N2138: C1.2 R2.1 U15.68 X1.1 | length 262.4
  Top Layer w6.2: U15.68@5243.35,3323.45 5297.95,3268.84 R2.1@5297.95,3255.95 5297.95,3194.81 5311.89,3180.87 5318.8,3180.87 X1.1@5332.88,3166.79 5274.25,3166.79 C1.2@5270,3162.54
$1N2391: C3.2 U15.20 X2.2 | length 306.7
  Top Layer w6.2: C3.2@4789.17,3954.83 4791.74,3954.83 4829.38,3917.18 4853.21,3917.18 ; 4853.28,3917.25 X2.2@4872.27,3898.27 4872.27,3869.9 U15.20@4993.77,3748.4
$1N2395: C4.2 U15.21 X2.1 | length 257.9
  Top Layer w6.2: C4.2@4789.17,3890.83 4790.63,3890.83 X2.1@4827.73,3853.73 4868.95,3853.73 U15.21@4984.03,3738.65
$1N4026: R5.2 U15.52 | length 91.4
  Top Layer w6.2: R5.2@4990.05,3364.05 5004.31,3378.31 5027.97,3378.31 5060.8,3411.14 U15.52@5061.98,3411.14
$1N4187: C25.1 U15.30 | length 281.3
  Top Layer w6.2: C25.1@4669.49,3782.51 4776,3676 4871.31,3676 U15.30@4896.34,3650.97
$1N4454: C28.2 R6.1 U15.24 | length 308.3
  Top Layer w6.2: R6.1@4712.05,3813.95 4714.3,3813.95 C28.2@4741.17,3840.83 4842,3740 4924.22,3740 U15.24@4954.8,3709.42
$1N4706: C30.2 L3.2 U15.101 | length 194.3
  Top Layer w6.2: U15.101@5477.19,3670.45 5478.37,3670.45 5510.13,3702.22 5530.22,3702.22 C30.2@5592.83,3764.83 L3.2@5620.83,3736.83
$1N4863: R7.2 U15.102 | length 150.9
  Top Layer w6.2: U15.102@5467.44,3680.2 5561.95,3774.71 R7.2@5561.95,3791.95
$1N6032: R8.1 U15.48 | length 84.2
  Top Layer w6.2: R8.1@4962.05,3394.05 4966.94,3394.05 U15.48@5023,3450.11
$1N7258: C32.2 L1.1 U15.1 | length 105.1
  Top Layer w7: U15.1@5178.94,3933.57 5188.36,3942.98 L1.1@5188.39,3987.71 C32.2@5188.36,4034.76
$1N7639: R10.1 U15.15 | length 53.7
  Top Layer w6.18: R10.1@5004.05,3833.95 5005.66,3833.95 U15.15@5042.49,3797.12
$1N8202: L4.1 U15.96 | length 64.5
  Top Layer w6.2: U15.96@5516.16,3596.26 5519.74,3596.26 L4.1@5562.83,3553.17
$1N11415: TP5.1 U15.34 | length 913.3
  Top Layer w6.2: v1(4696,3552) 4716,3532 4852,3532 4870,3550 4870,3569.92 U15.34@4886.6,3586.52 ; TP5.1@4798.99,3156.38 4830,3187.39 v1(4830,3192)
  内层1 w6.2: v1(4696,3552) 4792,3552 4840,3600 4870,3600 4886,3584 4886,3568 4858,3540 4858,3220 v1(4830,3192)
$1N11416: TP6.1 U15.33 | length 491.1
  Top Layer w6.2: TP6.1@4759.62,3156.38 4804,3200.76 v1(4804,3202) ; v1(4846,3570) 4850.59,3570 U15.33@4876.85,3596.26
  内层1 w6.2: v1(4804,3202) 4846,3244 v1(4846,3570)
$2N1488: C40.1 R13.1 R14.2 U1.14 | length 456.1
  Top Layer w6.18: C40.1@6233.47,3182.14 6277.12,3182.14 R14.2@6282.07,3187.09 6282.07,3225.61 R13.1@6281.53,3226.14
  Top Layer w6.2: R14.2@6282.07,3187.09 6295.93,3173.23 6295.93,3172.7 6301.25,3167.38 6301.78,3167.38 6317.16,3152 6410,3152 6436,3178 6436,3274 6386.48,3323.52 U1.14@6386.48,3344.09
$2N1577: L5.2 U1.11 | length 80.5
  Top Layer w10: L5.2@6258.93,3343.66 6338.8,3343.66 U1.11@6339.23,3344.09
$2N2468: C42.1 R15.1 R16.2 U1.3 | length 170.5
  Top Layer w6.18: R16.2@6307.89,3553.06 6307.89,3541.56 C42.1@6344.39,3505.06 6361.14,3488.31 6362.68,3488.31 6370.73,3480.25 U1.3@6370.73,3466.14
  Top Layer w10: R15.1@6254.93,3544.1 6298.93,3544.1 R16.2@6307.89,3553.06
$2N2471: L6.2 U1.6 | length 58
  Top Layer w10: L6.2@6255.48,3445.84 6300.47,3445.84 U1.6@6309.7,3436.61
$2N2629: C44.1 R17.1 R18.2 U1.2 | length 176.5
  Top Layer w6.18: U1.2@6386.48,3466.14 6386.48,3501.58 R18.2@6400.93,3516.02 6414.8,3529.89 6415.32,3529.89 6420.63,3535.21 6420.63,3535.73 6445.97,3561.06 C44.1@6457.47,3561.06 6469.89,3573.48 R17.1@6469.89,3601.06
$2N2632: L7.2 U1.20 | length 66.8
  Top Layer w10: U1.20@6431.75,3436.61 6459.4,3464.26 L7.2@6459.4,3492
$2N3621: C46.2 R19.1 U1.8 U1.18 | length 240.3
  Top Layer w6.18: U1.18@6431.75,3405.11 6446.89,3405.11 6482.22,3369.78 C46.2@6484.79,3369.78 6511.97,3396.96 R19.1@6511.97,3409.06
  Top Layer w6.2: U1.8@6309.7,3405.11 U1.18@6431.75,3405.11
$2N4217: C52.1 R20.1 R21.2 U5.5 | length 558.9
  Top Layer w10: U5.5@4318.81,3770.6 4321.22,3773 v1(4375,3773) ; R20.1@4403.04,3988 4418.96,3988 4442.12,3964.84 4448.83,3964.84 4455.27,3958.41 4455.27,3951.69 R21.2@4470.96,3936 4496.03,3936 4501.37,3930.66 4549.34,3930.66 4562,3918 4562,3858 4533,3829 v1(4520,3829) ; 4415.46,4000.42 C52.1@4415.46,4028
  Bottom Layer w10: v1(4375,3773) 4431,3829 v1(4520,3829)
$2N4283: L8.2 U5.3 | length 76
  Top Layer w10: U5.3@4421.19,3845.4 4424.6,3848.82 L8.2@4424.6,3920
$2N4539: C54.1 R22.1 U5.1 | length 95.4
  Top Layer w10: U5.1@4421.19,3770.6 U5.1@4429.24,3762.54 ; R22.1@4431.04,3718 4431.04,3760.74 U5.1@4429.24,3762.54 ; C54.1@4468,3762.54 U5.1@4429.24,3762.54
$5N3312: R30.1 USB1.10 | length 87.5
  Top Layer w10: v1(6830,3682) 6830.78,3682.78 USB1.10@6875.16,3682.78
  Bottom Layer w10: R30.1@6788.35,3682.77 6789.12,3682 v1(6830,3682)
$5N3316: R29.1 USB1.4 | length 87.1
  Top Layer w10: v1(6832,3564.67) USB1.4@6875.16,3564.67
  Bottom Layer w10: R29.1@6788.35,3565.36 6789.04,3564.67 v1(6832,3564.67)
$6N764: C7.2 CN1.5 CN1.6 | length 161.4
  Top Layer w6.2: CN1.5@4012.4,3313.67 CN1.6@4061.62,3313.67
  Top Layer w10: CN1.5@4012.4,3313.67 4012.4,3391.15 C7.2@4036.97,3415.72
$6N778: R24.2 SW2.3 SW2.4 | length 239.2
  Top Layer w6.18: SW2.3@6113.18,3968.49 SW2.4@6290.34,3968.49 6315.11,3943.72 R24.2@6315.11,3916.71
$6N781: R23.2 SW1.3 SW1.4 | length 241.1
  Top Layer w8: R23.2@6546.41,3177.88 6604.64,3177.88 SW1.4@6608.7,3181.94 SW1.3@6608.7,3359.11
$6N783: LED1.2 R26.1 | length 71.2
  Top Layer w6.2: LED1.2@5514.46,3186.44 5516,3187.98 R26.1@5516,3256.96
$6N797: R32.1 R33.2 SW3.1 | length 485.2
  Top Layer w10: SW3.1@3355.95,3318.4 3355.95,3413.95 3396,3454 3602,3454 3616,3468 3633.54,3468 ; R32.1@3665.48,3495.91 3637.57,3468 3633.54,3468 ; R33.2@3666.17,3435.37 3633.54,3468
$6N798: R34.1 R36.2 SW4.1 | length 503.8
  Top Layer w10: R34.1@3663.47,3793.15 3637.15,3793.15 v1(3608,3764) 3638.78,3733.22 R36.2@3664.56,3733.22
  Bottom Layer w10: SW4.1@3355.95,3909.35 3355.95,3816.05 3400,3772 3600,3772 v1(3608,3764)
$8N1098: FPC1.10 R39.1 | length 852
  Top Layer w5: v1(5998.65,3819.67) 6012.96,3819.67 6013.97,3820.67 FPC1.10@6035.79,3820.67
  Top Layer w6.2: R39.1@6054,4038.96 6075.04,4038.96 v1(6090,4024)
  IO_PINS w6.2: v1(5998.65,3819.67) 6037.67,3819.67 6044,3826 6044,3930 6080,3966 6124,3966 6200,3890 6290,3890 6318,3918 6318,3946 6240,4024 v1(6090,4024)
$8N1891: L10.2 U11.1 U12.2 | length 235
  Bottom Layer w10: L10.2@6058,3600.85 6099.18,3559.67 6099.18,3534.91 ; U12.2@6091,3422 6081,3432 6081,3524.91 6081.15,3525.06 6081.15,3528.47 6087.58,3534.91 6099.18,3534.91 ; U11.1@6113.79,3549.51 6099.18,3534.91
ADC: C39.2 R11.1 U15.22 | length 444.1
  Top Layer w6.2: R11.1@4653.27,3970.81 4699.71,3970.81 C39.2@4702.21,3973.31 4702.21,3937.79 4872,3768 4935.19,3768 U15.22@4974.28,3728.91
CODEC_LINEOUT: U15.29
ETH_LED0: U15.117
ETH_LED1: U15.118
ETH_RXN: R42.1 U15.97 | length 2767.5
  Top Layer w6.2: R42.1@3816.49,3442.91 3816.49,3483.92 v1(3817.29,3484.71) ; U15.97@5516.16,3631.48 5534.68,3650 5796,3650 5806.11,3639.89 5806.11,3458.11 v1(5728,3380)
  IO_PINS w6.2: v1(3817.29,3484.71) 3878.58,3546 4014,3546 4174,3386 5003.67,3386 5008.05,3390.38 5008.05,3402.45 5012.44,3406.83 5016.07,3406.83 5020.45,3402.45 5020.45,3363.48 5024.84,3359.1 5028.47,3359.1 5032.85,3363.48 5032.85,3381.62 5037.24,3386 5106,3386 5130,3362 5286,3362 5330,3406 5412,3406 5450,3368 5716,3368 v1(5728,3380)
ETH_RXP: R43.1 U15.98 | length 2773.9
  Top Layer w6.2: R43.1@3866,3442.91 3868,3444.92 v1(3868,3484) ; U15.98@5506.42,3641.22 5529.2,3664 5810,3664 5824.06,3649.94 5824.06,3434.06 v1(5770,3380)
  IO_PINS w6.2: v1(3868,3484) 3910,3526 3994,3526 4184,3336 4676.63,3336 4682.57,3330.06 4697.43,3330.06 4703.37,3336 4921.54,3336 4929.54,3344 4933.17,3344 4937.56,3339.62 4937.56,3335.48 4941.94,3331.1 4945.57,3331.1 4949.96,3335.48 4949.96,3339.62 4954.34,3344 4957.97,3344 4962.36,3339.62 4962.36,3337.22 4974.76,3337.22 4974.76,3339.62 4979.14,3344 4982.77,3344 4987.16,3339.62 4987.16,3335.48 4991.54,3331.1 4995.17,3331.1 4999.56,3335.48 4999.56,3339.62 5003.94,3344 5007.57,3344 5011.96,3339.62 5011.96,3335.48 5016.34,3331.1 5019.97,3331.1 5024.36,3335.48 5024.36,3339.62 5028.74,3344 5032.37,3344 5036.76,3339.62 5036.76,3335.48 5041.14,3331.1 5044.77,3331.1 5057.67,3344 5500.63,3344 5508.32,3351.69 5523.18,3351.69 5532.87,3342 5748,3342 5770,3364 v1(5770,3380)
ETH_TXN: R55.1 U15.99 | length 2776.3
  Top Layer w6.2: R55.1@3913.49,3442.91 v1(3913.49,3484) ; U15.99@5496.67,3650.97 5523.71,3678 5820,3678 5842,3656 5842,3538.4 5846.5,3533.9 5846.5,3530.27 5842.12,3525.88 5840.47,3525.88 5836.09,3521.5 5836.09,3517.87 5840.47,3513.48 5842.12,3513.48 5846.5,3509.1 5846.5,3505.47 5842.12,3501.08 5840.47,3501.08 5836.09,3496.7 5836.09,3493.07 5840.47,3488.68 5842.12,3488.68 5846.5,3484.3 5846.5,3480.67 5842.12,3476.28 5840.47,3476.28 5836.09,3471.9 5836.09,3468.27 5840.47,3463.88 5842.12,3463.88 5846.5,3459.5 5846.5,3455.87 5842,3451.36 5842,3439.08 5846.5,3434.58 5846.5,3430.95 5842,3426.44 5842,3420 v1(5802,3380)
  IO_PINS w6.2: v1(3913.49,3484) 3935.49,3506 3976,3506 4164,3318 4951.57,3318 4957.77,3324.2 4978.23,3324.2 4984.43,3318 5502.13,3318 5506.32,3313.81 5521.18,3313.81 5525.37,3318 5788,3318 5802,3332 v1(5802,3380)
ETH_TXP: R56.1 U15.100 | length 2770.3
  Top Layer w6.2: R56.1@3963.23,3442.91 v1(3963.23,3484) ; U15.100@5486.93,3660.71 5518.22,3692 5826,3692 5862,3656 5862,3398 v1(5846,3382)
  IO_PINS w6.2: v1(3963.23,3484) 4159.23,3288 4789.25,3288 4793.25,3292 4957.68,3292 4962.57,3287.12 4977.43,3287.12 4982.32,3292 5822,3292 5846,3316 v1(5846,3382)
FSPI_CLK: R8.2 U10.6 | length 726.2
  Top Layer w6.2: U10.6@4387.61,3315.8 4389.41,3314 4424,3314 4438,3300 4438,3216 4464,3190 4758,3190 R8.2@4937.95,3369.95
FSPI_CS0N: U10.1 U15.47 | length 766.7
  Top Layer w6.2: U10.1@4694.69,3215.8 4733.8,3215.8 4743.94,3225.94 4750.14,3225.94 4760.44,3215.65 4766.64,3215.65 4769.21,3218.22 4769.21,3224.42 4723.46,3270.17 4723.46,3276.37 4726.03,3278.94 4732.23,3278.94 4777.97,3233.19 4784.17,3233.19 4786.74,3235.76 4786.74,3241.96 4740.98,3287.71 4740.98,3293.91 4743.55,3296.48 4749.75,3296.48 4795.51,3250.72 4802.72,3250.72 4848.72,3296.72 4848.72,3303.94 4823.65,3329.02 4823.65,3335.22 4826.21,3337.78 4832.41,3337.78 4841,3329.2 4847.2,3329.2 4946,3428 4981.41,3428 U15.47@5013.26,3459.86
FSPI_D0: TP2.1 U10.5 U15.41 | length 810.4
  Top Layer w6.2: U10.5@4387.61,3365.8 4413.59,3391.78 4426.23,3391.78 4462.45,3428 4618.61,3428 4623,3423.62 4623,3414.38 4627.38,3410 4631.01,3410 4635.4,3414.38 4635.4,3441.62 4639.78,3446 4643.41,3446 4647.8,3441.62 4647.8,3414.38 4652.18,3410 4655.81,3410 4660.2,3414.38 4660.2,3441.62 4664.58,3446 4668.21,3446 4672.6,3441.62 4672.6,3414.38 4676.98,3410 4680.61,3410 4685,3414.38 4685,3441.59 4689.38,3445.98 4693.01,3445.98 4697.4,3441.59 4697.4,3432.38 4701.78,3428 4853.55,3428 4873.22,3447.67 4879.11,3447.67 4911.44,3480 4916.48,3480 U15.41@4954.8,3518.32
FSPI_D1: U10.2 U15.42 | length 825.8
  Top Layer w6.2: U10.2@4694.69,3265.8 4672.89,3244 4656,3244 4634,3266 4634,3280.85 4638.38,3285.23 4665.62,3285.23 4670,3289.62 4670,3293.25 4665.62,3297.63 4623.36,3297.63 4618.98,3302.02 4618.98,3305.65 4623.36,3310.03 4659.42,3310.03 4663.8,3314.42 4663.8,3318.05 4659.42,3322.43 4623.36,3322.43 4618.98,3326.82 4618.98,3330.45 4623.36,3334.83 4665.62,3334.83 4670,3339.22 4670,3342.85 4665.62,3347.23 4625.3,3347.23 4620.92,3351.62 4620.92,3355.25 4625.3,3359.63 4629.62,3359.63 4634,3364.02 4634,3372 4661.78,3399.78 4839.78,3399.78 4877.45,3437.45 4883.34,3437.45 4913.88,3468 4923.97,3468 U15.42@4964.54,3508.58
FSPI_D2: R37.1 U10.3 U15.44 | length 926.9
  Top Layer w6.2: R37.1@4759.28,3316.2 4695.08,3316.2 U10.3@4694.69,3315.8 4694.69,3321.46 4735.23,3362 4750.08,3362 4754.46,3357.62 4754.46,3346.38 4758.85,3342 4762.48,3342 4766.86,3346.38 4766.86,3377.62 4771.25,3382 4774.88,3382 4779.26,3377.62 4779.26,3346.38 4783.65,3342 4787.28,3342 4791.66,3346.38 4791.66,3377.62 4796.05,3382 4799.68,3382 4804.06,3377.62 4804.06,3346.38 4808.45,3342 4812.08,3342 4816.46,3346.38 4816.46,3377.62 4820.85,3382 4824.48,3382 4828.86,3377.62 4828.86,3354.2 4833.25,3349.82 4836.88,3349.82 4841.26,3354.2 4841.26,3377.62 4845.65,3382 4849.28,3382 4853.66,3377.62 4853.66,3366.38 4858.05,3362 4863.88,3362 4940.1,3438.22 4964.11,3438.22 v1(4971.84,3445.94) ; U15.44@4984.03,3489.09 5008.94,3514 5050,3514 5090,3474 v1(5090,3462.07)
  Bottom Layer w6.2: v1(4971.84,3445.94) 5073.88,3445.94 v1(5090,3462.07)
FSPI_D3: R38.1 U10.7 U15.39 | length 836.5
  Top Layer w6.2: U10.7@4387.41,3266 4356,3297.41 4356,3384 4374,3402 4422,3402 4490,3470 4810.68,3470 4816.68,3476 4873.5,3476 U15.39@4935.31,3537.81
  Top Layer w6.5: R38.1@4325.22,3266 U10.7@4387.41,3266
  Top Layer w7: U10.7@4387.41,3266 U10.7@4387.61,3265.8
GND: C1.1 C2.2 C3.1 C4.1 C6.1 C7.1 C8.1 C9.1 C10.2 C11.1 C12.1 C13.2 C14.1 C15.1 C16.1 C17.1 C21.1 C22.1 C23.1 C24.1 C25.2 C28.1 C29.1 C30.1 C31.1 C32.1 C33.1 C34.1 C35.1 C36.1 C37.2 C38.2 C39.1 C41.2 C43.2 C45.2 C46.1 C47.1 C48.1 C49.1 C50.2 C51.1 C53.1 C54.2 C56.1 C57.1 C58.1 C62.1 C63.1 C64.1 C65.1 C75.1 C76.1 CARD1.6 CARD1.10 CARD1.11 CARD1.12 CARD1.13 CN1.7 CN1.8 D1.1 FPC1.5 FPC1.12 FPC1.19 FPC1.20 FPC1.27 FPC1.28 FPC1.35 FPC1.36 FPC1.38 FPC1.41 FPC1.42 FPC2.4 FPC2.7 FPC2.8 FPC3.1 FPC3.3 FPC3.6 FPC3.9 FPC3.12 FPC3.15 FPC3.17 FPC3.18 FPC3.21 FPC3.22 FPC4.1 FPC4.5 FPC4.6 R5.1 R7.1 R14.1 R16.1 R18.1 R21.1 R28.1 R29.2 R30.2 R33.1 R36.1 R44.1 R45.1 R46.1 SW1.1 SW1.2 SW2.1 SW2.2 SW5.4 U1.21 U5.2 U6.5 U6.10 U7.2 U8.1 U8.4 U8.14 U10.4 U10.9 U11.2 U15.37 U15.57 U15.129 USB1.1 USB1.12 USB1.13 USB1.14 X1.2 X1.4 | length 1392.1
  Top Layer w5: FPC1.12@6035.79,3781.27 6001.27,3781.27 5996,3776 5978,3776 5970,3784 5970,3908 5981.07,3919.07 FPC1.5@6035.79,3919.07
  Top Layer w6.2: CN1.8@4155.32,3211.31 v1(4292,3211.31) ; C62.1@4266.07,3387.73 4310.48,3387.73 C63.1@4322.56,3399.81 4334.64,3399.81 v1(4338.77,3403.94) ; v1(4448,3354) 4477.95,3354 U10.9@4541.15,3290.8 ; v1(4690,3348) 4694.69,3352.69 U10.4@4694.69,3365.8 ; v1@4900,3526 4902.87,3528.87 v1(4902.87,3530.74) 4904.5,3532.38 4904.5,3544.78 4915.83,3556.1 U15.37@4915.83,3557.29 ; R5.1@4965.95,3339.95 4992.83,3313.08 C14.1@4992.83,3312.83 4985.06,3305.06 v1(4970,3305.06) ; v1(6330,3642) 6341.97,3630.03 R16.1@6341.97,3553.06
  Top Layer w7: C12.1@5054.58,3253.08 5056.93,3255.43 5095.43,3255.43 5114,3274 5114,3314 5098.97,3329.03 5098.97,3350.07 5110.7,3361.8 U15.57@5110.7,3362.42
  Top Layer w10: C2.2@5469.46,3254 5469.46,3232.54 v1(5470,3232) ; C34.1@5469.46,3302 5492,3302 5494.39,3304.39 5494.39,3306.72 5500.82,3313.16 5500.82,3318.82 v1(5515.75,3333.75) ; v1(5998.66,3645.94) 6001.12,3643.47 FPC1.19@6035.79,3643.47
  Bottom Layer w5: v1(5160,3712) 5173.46,3725.46 C33.1@5173.46,3746
  Bottom Layer w10: v1(5752,3498) 5784,3498 5908.44,3622.44 C64.1@5944,3622.44
  other v1: 5200,3142.81 4248,3152 4274,3152 5626,3172 5652,3172 3324,3176 3350,3176 5718,3176 5744,3176 3526,3180 3552,3180 4248,3180 4274,3180 3840,3184 3866,3184 3998,3184 4024,3184 6402,3192 5626,3200 5652,3200 3324,3204 3350,3204 5718,3204 5744,3204 3526,3208 3552,3208 3840,3212 3866,3212 3998,3212 4024,3212 5326.97,3232.97 5008,3262 6682,3262 6708,3262 6466,3268 6492,3268 6682,3290 6708,3290 6466,3296 6492,3296 6073.97,3312.81 6398.29,3381.12 5982,3386 4877.25,3403.94 6398,3430 3284,3462 3310,3462 6580,3468 6606,3468 6061.16,3476 3284,3490 3310,3490 6580,3496 6606,3496 7024,3516 7050,3516 7024,3544 7050,3544 6818,3614 6618,3644 7030,3648 7056,3648 5292,3654 7030,3676 7056,3676 3276,3738 3302,3738 3276,3766 3302,3766 4090,3784 4116,3784 4090,3812 4116,3812 3740,3864 3766,3864 6552,3864 4472,3878 3740,3892 3766,3892 4693.46,3898.17 6423.01,3927.65 6449.01,3927.65 5670,3950 5696,3950 6423.01,3955.65 6449.01,3955.65 5562,3960 5588,3960 5670,3978 5696,3978 5562,3988 5588,3988 4500,4000 3286,4018 3312,4018 3606,4018 3632,4018 3950,4018 3976,4018 4236,4018 4262,4018 3286,4046 3312,4046 3606,4046 3632,4046 3950,4046 3976,4046 4236,4046 4262,4046 4738,4046 4764,4046 4972.8,4047.47 4998.8,4047.47 6250,4054 4738,4074 4764,4074 4972.8,4075.47 4998.8,4075.47
IO4_A0: U15.46
IO4_A1: SW5.1 U15.45 | length 1391.2
  Top Layer w6.2: v1(4094,3618) 4094.14,3618.14 SW5.1@4094.14,3686.7 ; U15.45@4993.77,3479.34 5012.43,3498 5028,3498 5082,3444 5108,3444 v1(5122,3458)
  IO_PINS w6.2: v1(4094,3618) 4094,3554 4222,3426 5090,3426 v1(5122,3458)
IO4_A5: SW4.2 U15.40 | length 1667.2
  Top Layer w6.2: v1(4826,3457.89) 4874.88,3457.89 U15.40@4945.05,3528.06
  IO_PINS w6.2: v1(3640,3908) 3894,3654 4124,3654 4244,3534 4711.33,3534 4787.45,3457.89 v1(4826,3457.89)
  Bottom Layer w6.2: SW4.2@3493.75,3908.95 3639.05,3908.95 v1(3640,3908)
IO4_A7: SW3.2 U15.38 | length 1849
  Top Layer w6.2: SW3.2@3493.75,3318.8 v1(3638,3318.8) ; U15.38@4925.57,3547.54 4952,3573.97 v1(4952,3584)
  IO_PINS w6.2: v1(3638,3318.8) 3638,3334 3940,3636 4112,3636 4283.5,3464.5 4615.5,3464.5 4642,3438 4884,3438 4970,3524 4970,3566 v1(4952,3584)
LCD+: C65.2 FPC1.39 U11.5 U12.1 | length 527.5
  Top Layer w6.2: FPC1.39@6035.79,3249.77 6072.23,3249.77 6086,3236 v1(6086,3218)
  Bottom Layer w6.2: U12.1@6041,3422 6041,3403 6138,3306 6138,3244 6134.27,3240.27 6134.27,3229.51 6128.95,3224.19 6118.19,3224.19 6112,3218 v1(6086,3218)
  Bottom Layer w10: C65.2@5958.54,3517.08 5963.51,3512.11 U11.5@6007.49,3512.11 6026.89,3512.11 6041,3498 U12.1@6041,3422
LCD-: FPC1.40 R44.2 R45.2 U11.3 | length 513.1
  Top Layer w6.2: FPC1.40@6035.79,3230.07 6037.93,3230.07 v1(6070,3198)
  Bottom Layer w6.2: U11.3@6113.79,3474.71 6142.76,3445.74 6173.92,3445.74 R45.2@6231.65,3445.74
  Bottom Layer w10: v1(6070,3198) 6122,3198 6159.98,3235.98 6159.98,3345.81 6190,3375.82 6190,3429.66 6173.92,3445.74 R44.2@6173.07,3446.58
LCD_D0: FPC1.18 U15.84 | length 1385.7
  Top Layer w5: v1(5396,3542) 5399.24,3538.76 5399.24,3509.85 5388.52,3499.13 5388.52,3492.1 5399.24,3481.38 U15.84@5399.24,3479.34 ; FPC1.18@6035.79,3663.17 6041.1,3668.48 6062.93,3668.48 6085.93,3691.49 6085.93,3858 6098.59,3870.66 v1(6132.3,3870.66)
  CONNECTION w5: v1(5396,3542) 5406,3532 5543.25,3532 5558.98,3547.73 5558.98,3593.53 5563.98,3598.53 6051.78,3598.53 6082.98,3629.73 6082.98,3843.55 6093.27,3853.83 6115.47,3853.83 v1(6132.3,3870.66)
LCD_D1: FPC1.17 U15.83 | length 1535.1
  Top Layer w5: v1(5373.5,3560) 5373.5,3507.41 5378.77,3502.14 5378.77,3482.36 5389.5,3471.63 U15.83@5389.5,3469.6 ; FPC1.17@6035.79,3682.87 6041.1,3688.18 6062.93,3688.18 6076.92,3702.17 6076.92,3884.92 6091.24,3899.24 v1(6109.24,3899.24)
  CONNECTION w5: v1(5373.5,3560) 5373.5,3539.98 5390.49,3522.98 5546.98,3522.98 5568,3544 5568,3584.52 5573,3589.52 6055.52,3589.52 6092,3626 6092,3839.82 6097,3844.82 6135.32,3844.82 6152,3861.5 6152,3884 6134.76,3901.24 6111.24,3901.24 v1(6109.24,3899.24)
LCD_D2: FPC1.16 U15.90 | length 1342.4
  Top Layer w5: v1(5430.46,3562.23) 5433.28,3562.23 U15.90@5457.71,3537.81 ; FPC1.16@6035.79,3702.57 6049.69,3702.57 6054.95,3707.83 6062.93,3707.83 6067.9,3712.8 6067.9,3907.9 6084,3924 v1(6106,3924)
  CONNECTION w5: v1(5430.46,3562.23) 5436.46,3556.23 5436.46,3555.54 5450.98,3541.02 5539.52,3541.02 5549.97,3551.47 5549.97,3597.47 5560.05,3607.55 6048.05,3607.55 6073.97,3633.47 6073.97,3847.28 6088.95,3862.27 6088.95,3919 6093.95,3924 v1(6106,3924)
LCD_D3: FPC1.15 U15.91 | length 780.4
  Top Layer w5: v1(5412.28,3588.28) 5426.71,3588.28 5435.41,3579.57 5437.64,3579.57 5447.8,3569.41 5447.8,3567.18 U15.91@5467.44,3547.54 ; v1(5977.59,3707.45) 5984.55,3714.42 5984.99,3714.42 5992.79,3722.22 FPC1.15@6035.79,3722.22
  CONNECTION w5: v1(5412.28,3588.28) 5415.92,3591.92 5415.92,3613.92 5426.08,3624.08 5439.23,3624.08 5478.26,3663.11 5959.11,3663.11 5977.59,3681.59 v1(5977.59,3707.45)